# Altium PCB PCB1.PcbDoc (part 1 of 2)
Units mm, origin at the board's own origin, x right, y up, seen from the top; angles counter-clockwise.
Board outline 88.39 x 69.6 mm, 4 copper layers (Top Layer, Layer 2, Layer 3, Bottom Layer), stack 0.603 mm thick; 126 components, 120 nets, 462 pads, 224 vias.
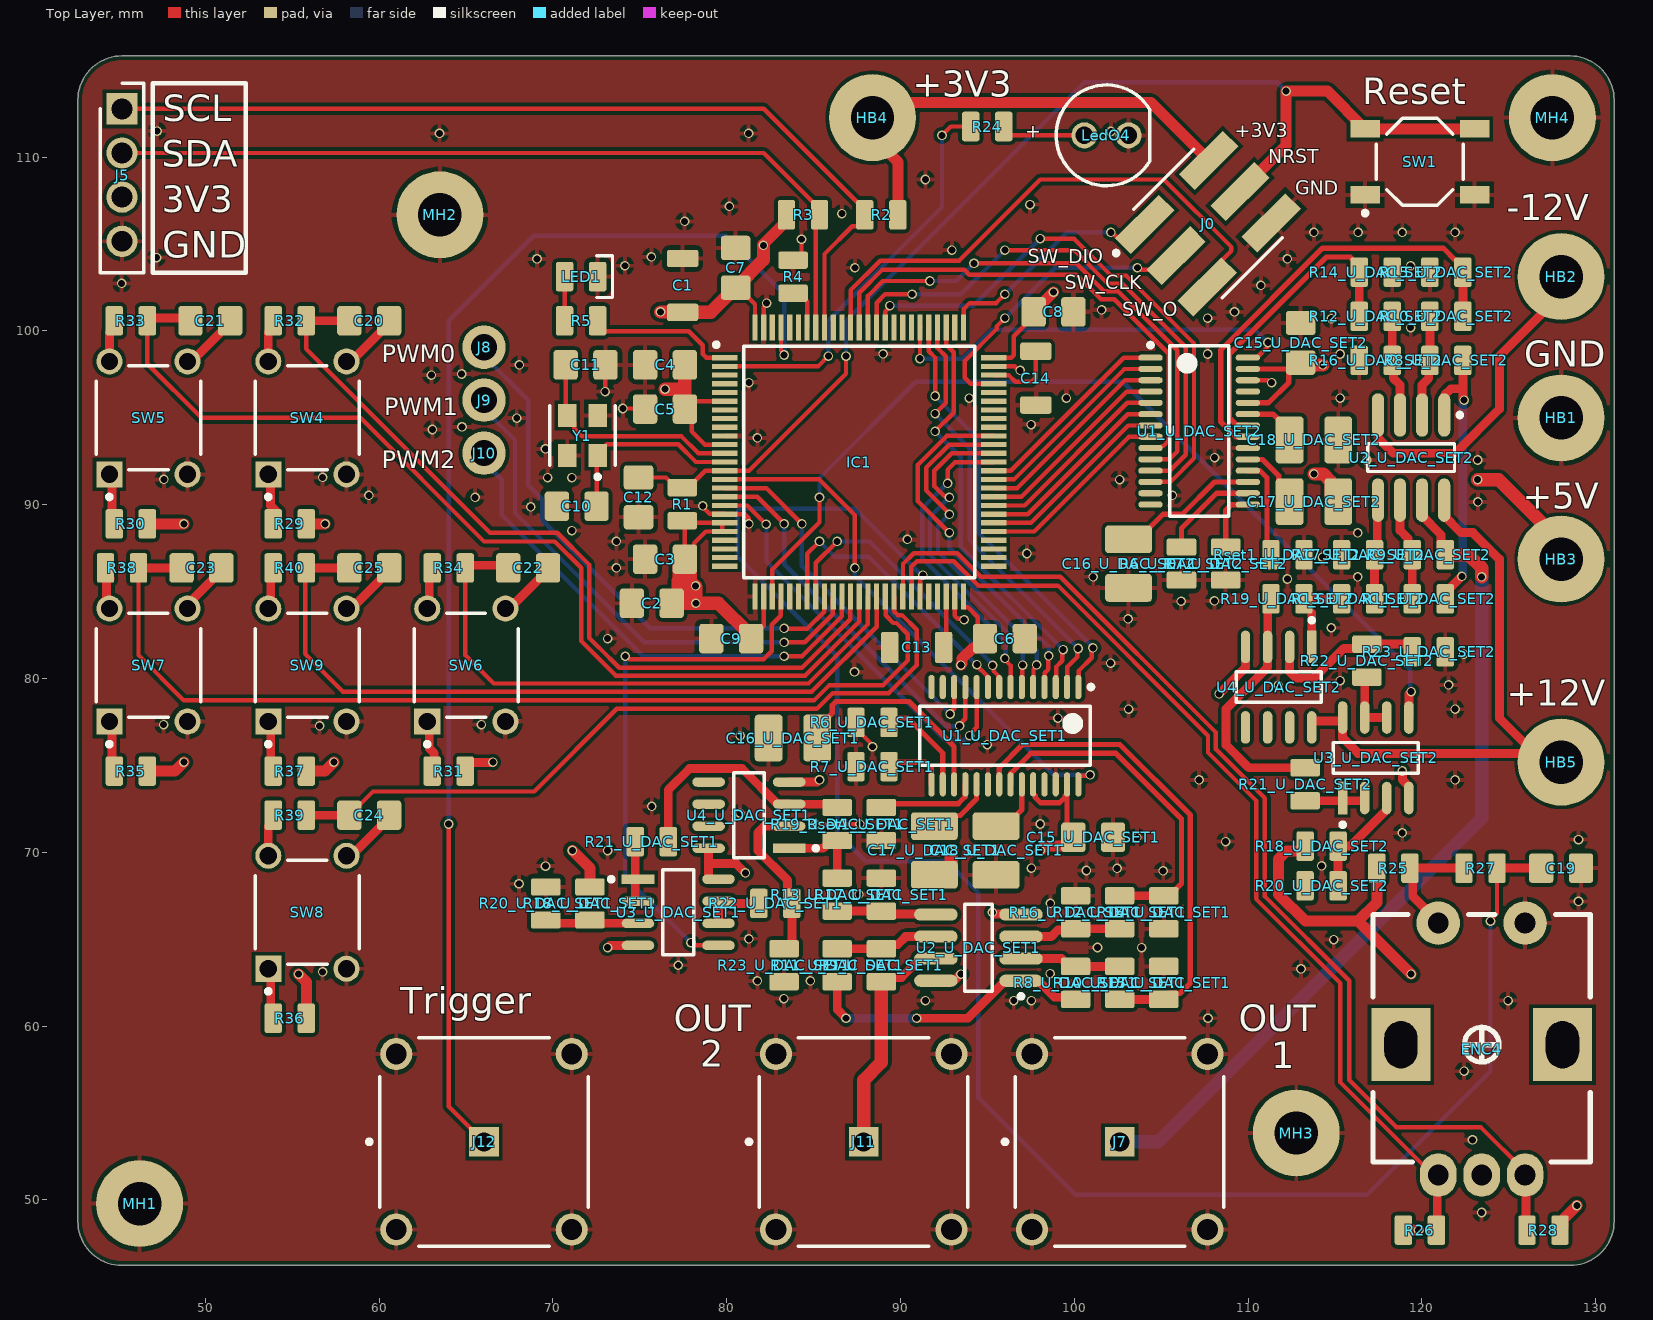
[diagram p0: Top Layer view]
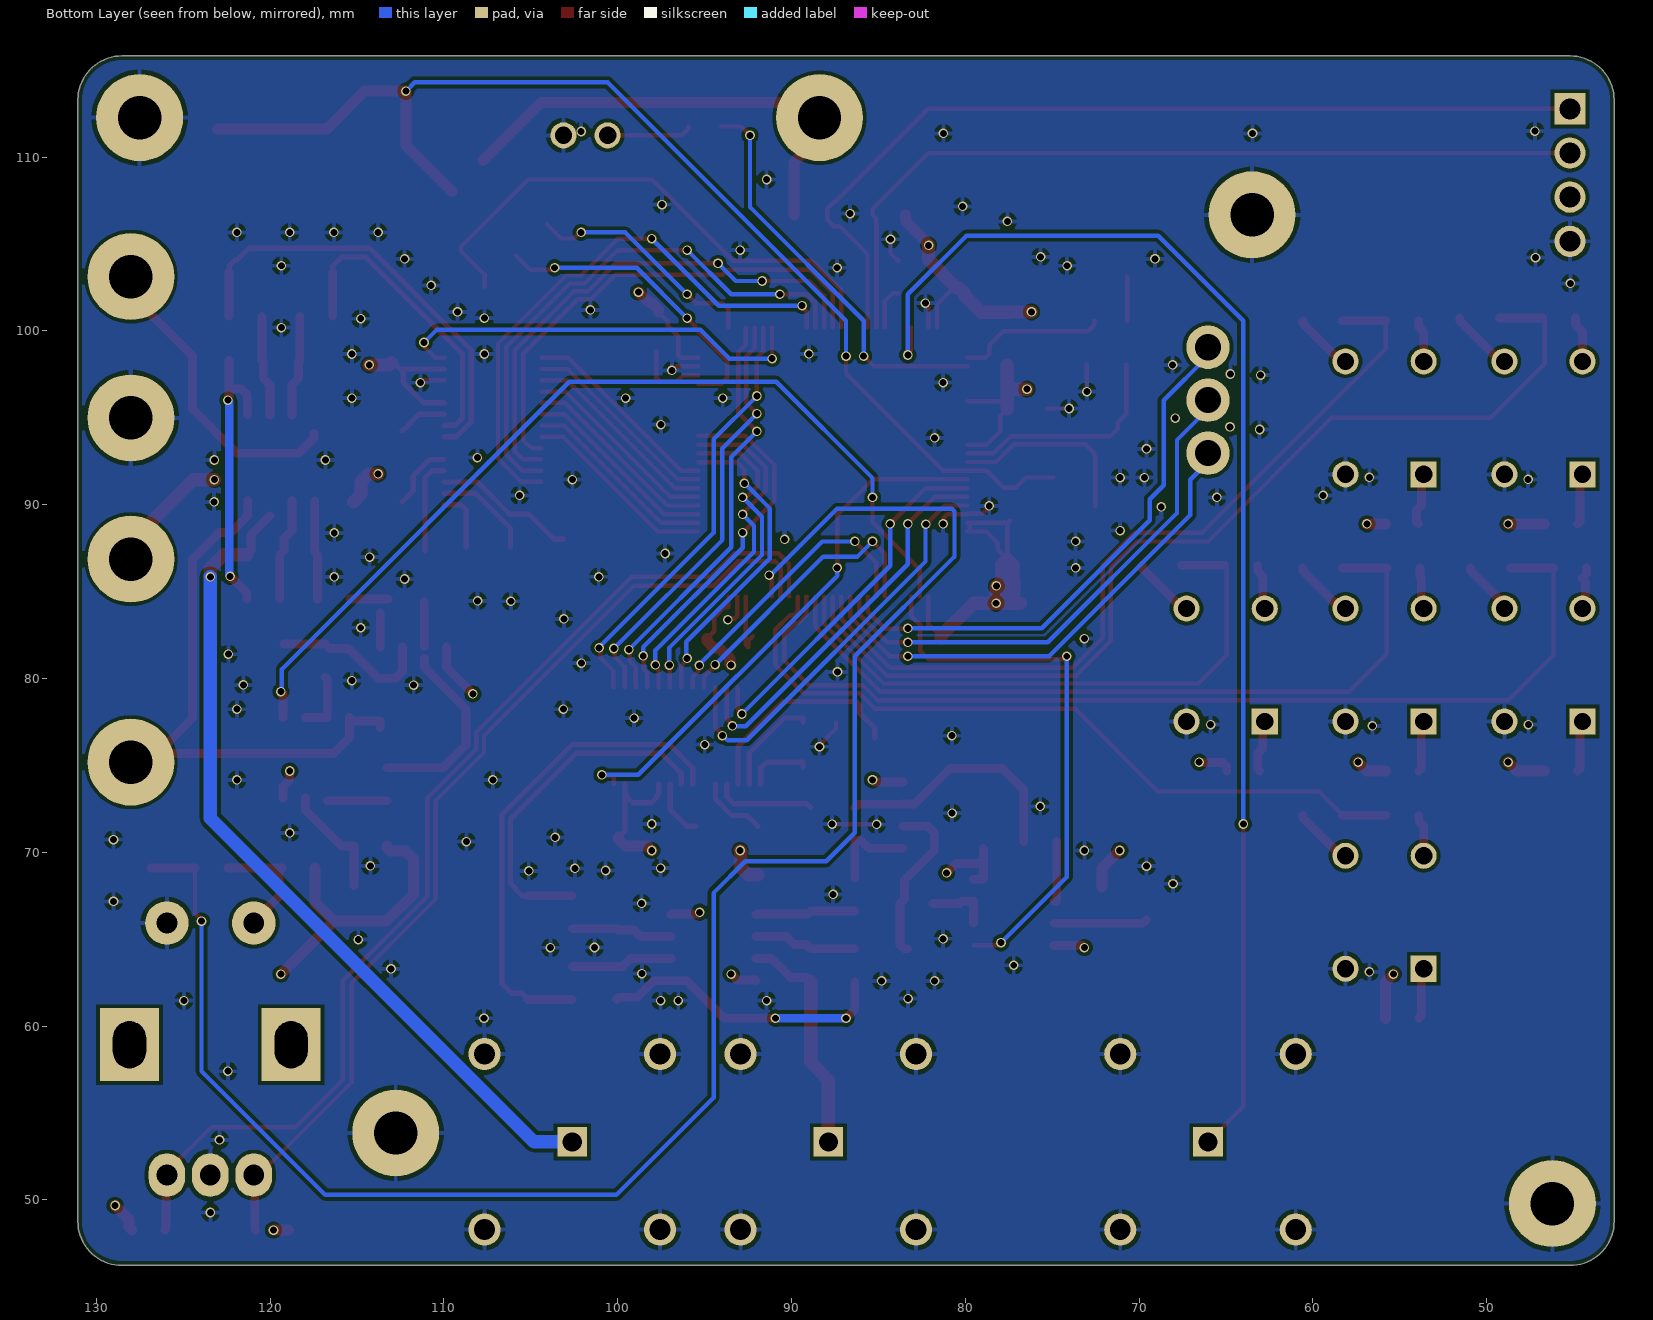
[diagram p1: Bottom Layer view, seen from below]
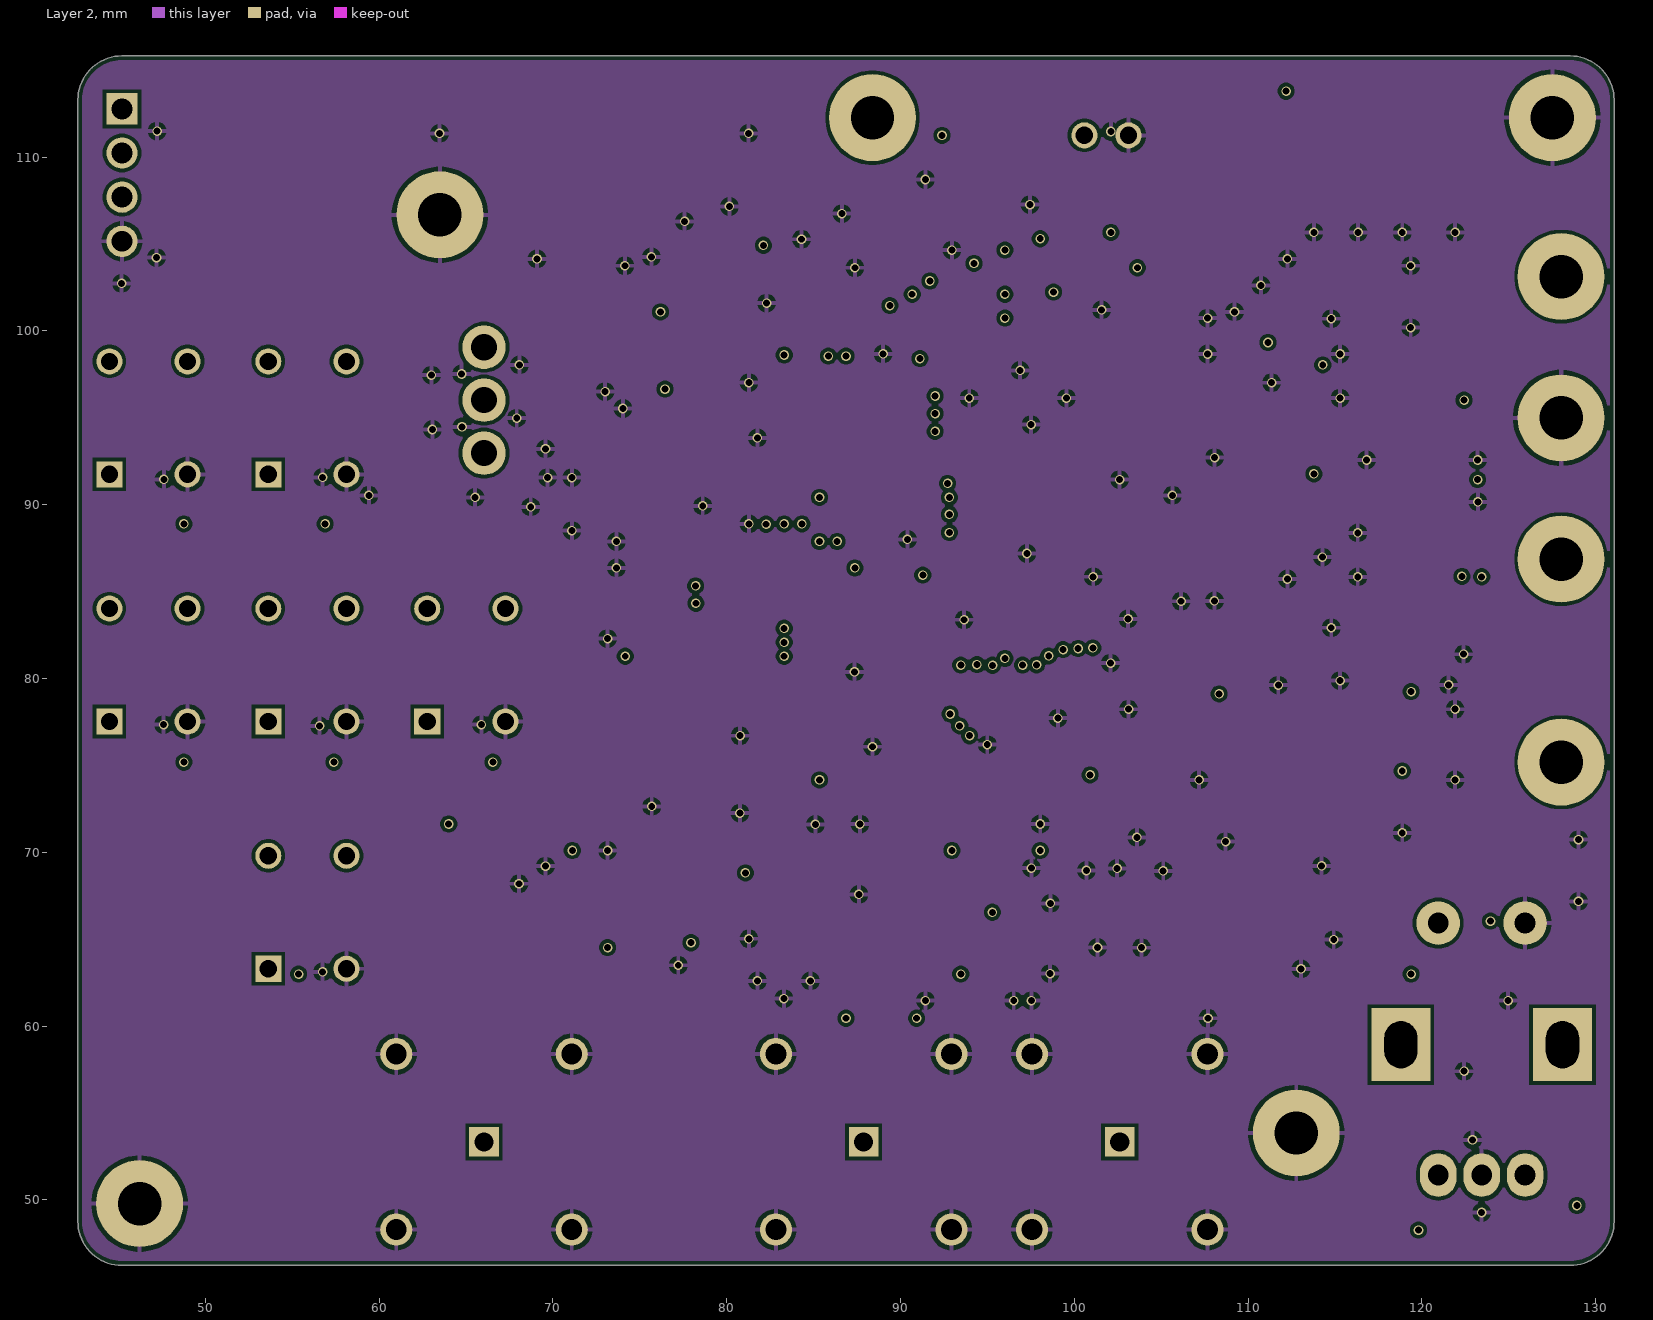
[diagram p2: Layer 2]
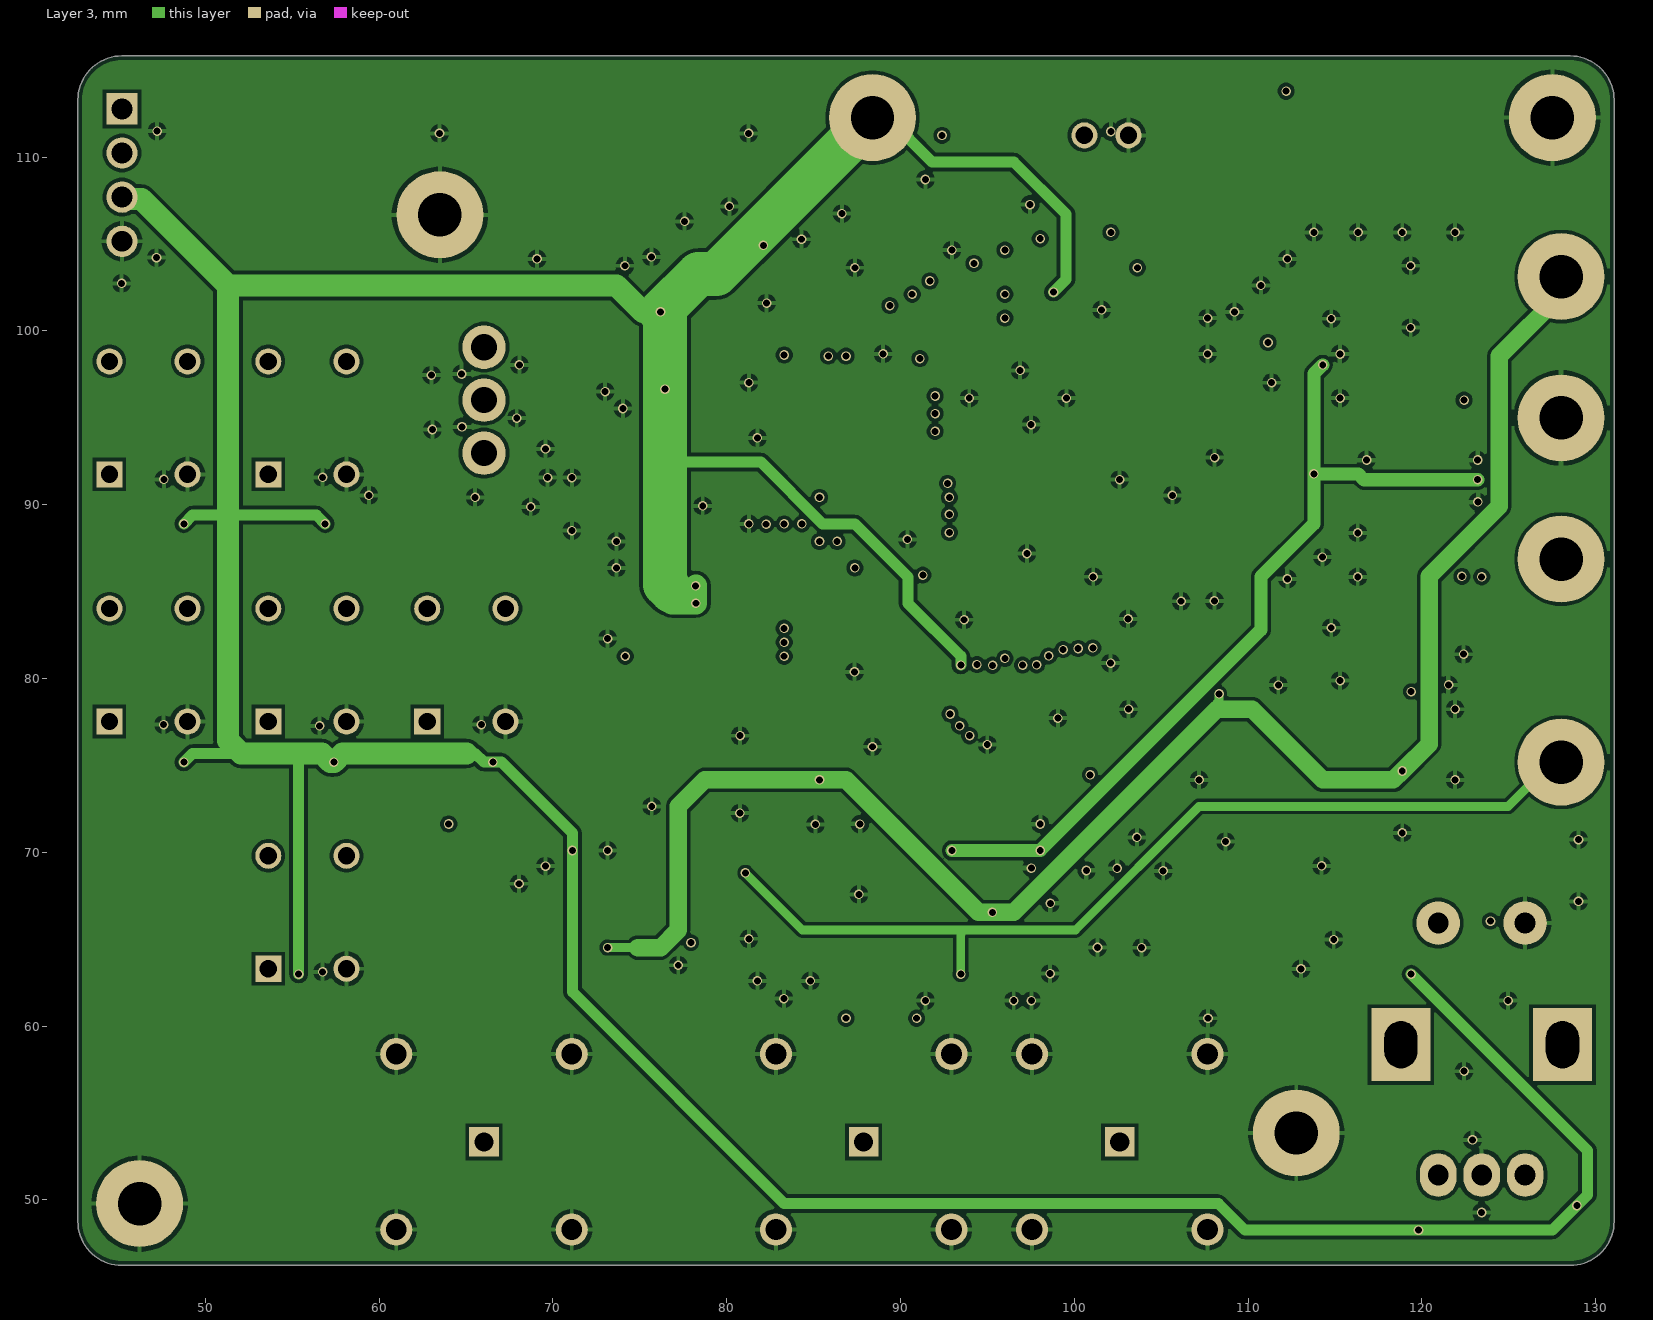
[diagram p3: Layer 3]
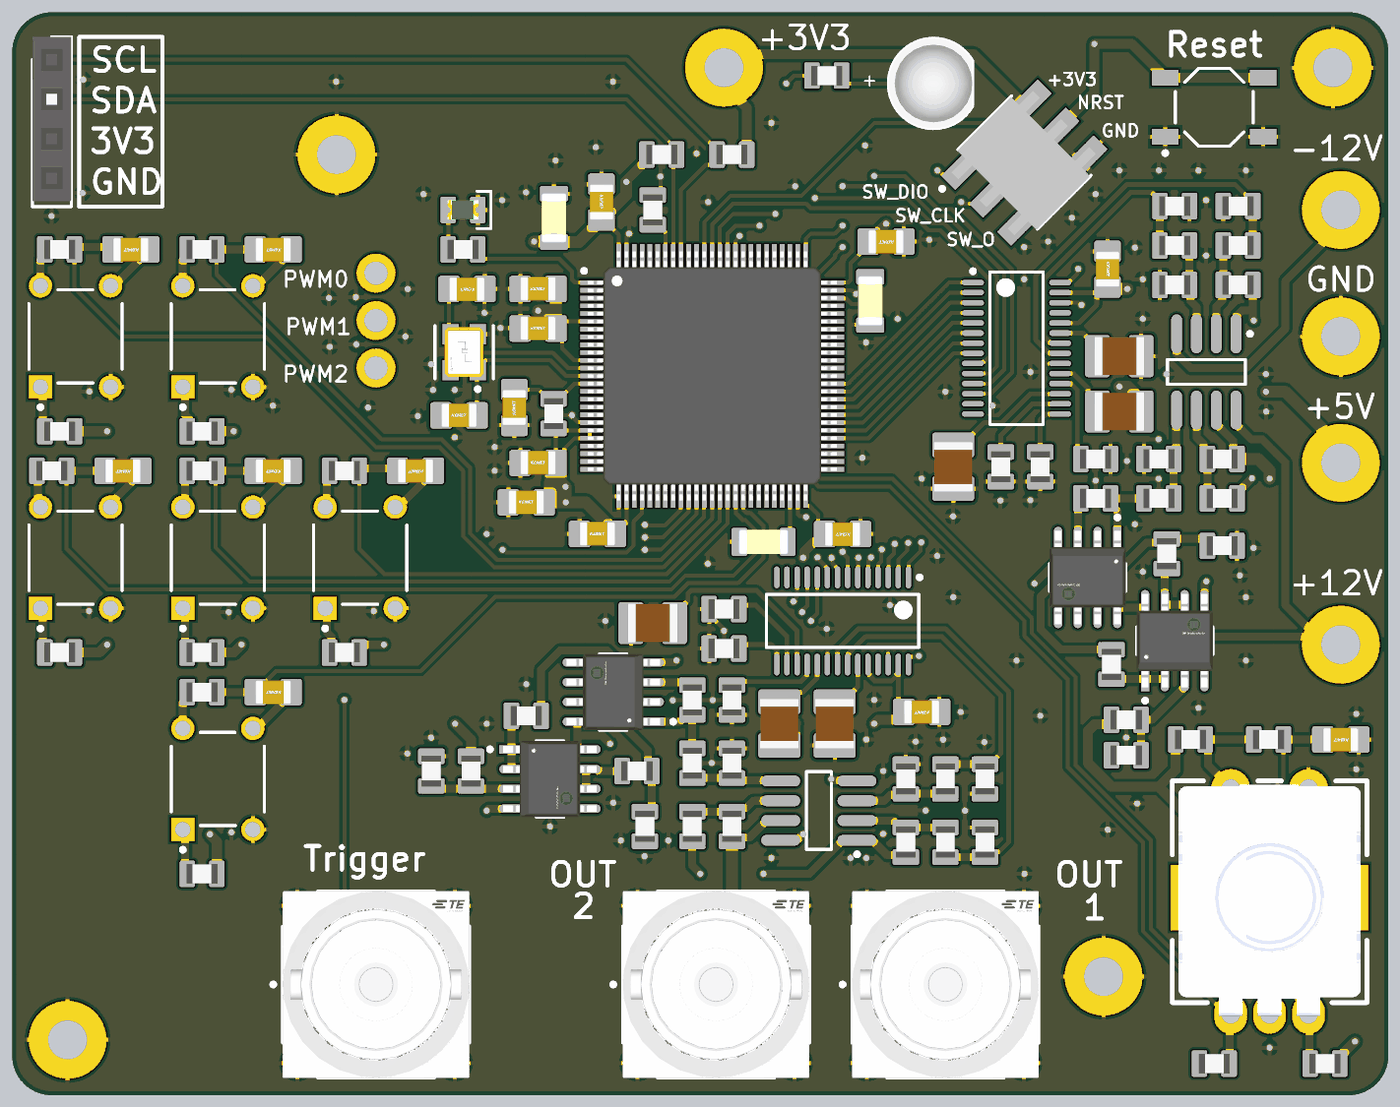
[diagram p5: 3D render of the assembled board from above, using the file's embedded part models]

## Layer stack, top to bottom
Top Solder: solder mask 0.0102, Solder Resist, Dk 3.5
Top Layer: signal copper 0.035
Dielectric 2: prepreg 0.0711, PP-006, Dk 4.1
Layer 2: signal copper 0.0356
Dielectric 1: dielectric 0.32, FR-4, Dk 4.8
Layer 3: signal copper 0.0356
Dielectric 3: prepreg 0.0711, PP-006, Dk 4.1
Bottom Layer: signal copper 0.035
Bottom Solder: solder mask 0.0102, Solder Resist, Dk 3.5

## Board outline
42.672,48.768 42.672,113.284 cw(c45.212,113.284) 45.212,115.824 128.524,115.824 cw(c128.524,113.284) 131.064,113.284 131.064,48.768 cw(c128.524,48.768) 128.524,46.228 45.212,46.228 cw(c45.212,48.768)

## Design rules (kind name [scope] priority, off if disabled: settings)
BoardOutlineClearance [All] p1: gap=0.254 ignorepadtopadclearanceinfootprint=FALSE except(0: Arc-SplitContinuation Track-SplitContinuation SMDPad-SplitContinuation THPad-SplitContinuation Via-SplitContinuation Fill-SplitContinuation Poly-SplitContinuation Region-SplitContinuation Text-SplitContinuation)
Clearance [All] p1: gap=0.203 ignorepadtopadclearanceinfootprint=TRUE
Creepage [All] p1 off: checkdistance=0.254 applytopolygonpour=TRUE
HoleSize [All] p1: absolutevalues=TRUE maxlimit=7.62 minlimit=0.025 maxpercent=80.000 minpercent=20.000
MinimumSolderMaskSliver [All] p1: minsoldermaskwidth=0.051
PolygonConnect [All] p1: connectstyle=Relief reliefconductorwidth=0.254 reliefentries=4 polygonreliefangle="90 Angle" airgapwidth=0.254
RoutingVias [All] p1: holewidth=0.711 width=1.27 viastyle="Through Hole" minholewidth=0.2 minwidth=0.3 maxholewidth=2.5 maxwidth=3
SilkToSolderMaskClearance [IsPad] p1: minsilkscreentomaskgap=0.102 clearancetoexposedcopper=TRUE
SolderMaskExpansion [All] p1: expansion=0.102 istentingtop=FALSE
SupplyNets "Schematic Supply Nets_4" [InNet('+3V3')] p1: voltage=0.000
SupplyNets "Schematic Supply Nets_3" [InNet('-12')] p2: voltage=0.000
SupplyNets "Schematic Supply Nets_2" [InNet('+12')] p3: voltage=0.000
SupplyNets "Schematic Supply Nets_1" [InNet('+5')] p4: voltage=0.000
SupplyNets "Schematic Supply Nets" [InNet('GND')] p5: voltage=0.000
Width [All] p1: maxlimit=3.81 minlimit=0.127 preferedwidth=1.27 midlayer1_prefwidth=0.762 midlayer2_prefwidth=0.762 minimp=50.000000 maximp=50.000000 favimp=50.000000
27 further rules are at their usual default settings.

## Classes and differential pairs
channel class DAC_SET1: U_DAC_SET1 U_DAC_SET2
component class U_Power_SET: HB1 HB2 HB3 HB4 HB5
component class U_Interface: C19 C20 C21 C22 C23 C24 C25 ENC4 J0 J5 J7 J8 J9 J10 J11 J12 LedO4 R24 R25 R26 R27 R28 R29 R30 R31 R32 R33 R34 R35 R36 R37 R38 R39 R40 SW4 SW5 SW6 SW7 SW8 SW9
component class U_DAC_SET2: C15_U_DAC_SET2 C16_U_DAC_SET2 C17_U_DAC_SET2 C18_U_DAC_SET2 R6_U_DAC_SET2 R7_U_DAC_SET2 R8_U_DAC_SET2 R9_U_DAC_SET2 R10_U_DAC_SET2 R11_U_DAC_SET2 R12_U_DAC_SET2 R13_U_DAC_SET2 R14_U_DAC_SET2 R15_U_DAC_SET2 R16_U_DAC_SET2 R17_U_DAC_SET2 R18_U_DAC_SET2 R19_U_DAC_SET2 R20_U_DAC_SET2 R21_U_DAC_SET2 R22_U_DAC_SET2 R23_U_DAC_SET2 Rset1_U_DAC_SET2 U1_U_DAC_SET2 U2_U_DAC_SET2 U3_U_DAC_SET2 U4_U_DAC_SET2
component class U_DAC_SET1: C15_U_DAC_SET1 C16_U_DAC_SET1 C17_U_DAC_SET1 C18_U_DAC_SET1 R6_U_DAC_SET1 R7_U_DAC_SET1 R8_U_DAC_SET1 R9_U_DAC_SET1 R10_U_DAC_SET1 R11_U_DAC_SET1 R12_U_DAC_SET1 R13_U_DAC_SET1 R14_U_DAC_SET1 R15_U_DAC_SET1 R16_U_DAC_SET1 R17_U_DAC_SET1 R18_U_DAC_SET1 R19_U_DAC_SET1 R20_U_DAC_SET1 R21_U_DAC_SET1 R22_U_DAC_SET1 R23_U_DAC_SET1 Rset1_U_DAC_SET1 U1_U_DAC_SET1 U2_U_DAC_SET1 U3_U_DAC_SET1 U4_U_DAC_SET1
component class Main_Schem: C1 C2 C3 C4 C5 C6 C7 C8 C9 C10 C11 C12 C13 C14 IC1 LED1 R1 R2 R3 R4 R5 SW1 Y1 ΜΗ1 ΜΗ2 ΜΗ3 ΜΗ4

## Components (designator, comment, footprint, x,y, rotation, side; value= is the part's Value field where it differs from the comment)
C1 "2u2" CAP_1206 77.47,102.616 r270 top
C2 "100n" CAP_0805 75.692,84.328 r0 top
C3 "100n" CAP_0805 76.454,86.868 r0 top
C4 "100n" CAP_0805 76.454,98.044 r0 top
C5 "100n" CAP_0805 76.454,95.504 r0 top
C6 "100n" CAP_0805 96.012,82.296 r180 top
C7 "100n" CAP_0805 80.518,103.632 r270 top
C8 "100n" CAP_0805 98.806,101.092 r180 top
C9 "100n" CAP_0805 80.264,82.296 r0 top
C10 "18p" CAP_0805 71.374,89.916 r0 top
C11 "18p" CAP_0805 71.882,98.044 r180 top
C12 "100n" CAP_0805 74.93,90.424 r90 top
C13 "2u2" CAP_1206 90.932,81.788 r0 top
C14 "2u2" CAP_1206 97.79,97.282 r90 top
C15_U_DAC_SET1 "100n" CAP_0805 101.092,70.866 r180 top (schematic designator C15)
C15_U_DAC_SET2 "100n" CAP_0805 113.03,99.314 r270 top (schematic designator C15)
C16_U_DAC_SET1 "0.1uF" CAP_1210 83.816,76.576 r180 top (schematic designator C16)
C16_U_DAC_SET2 "0.1uF" CAP_1210 103.124,86.614 r270 top (schematic designator C16)
C17_U_DAC_SET1 "0.1uF" CAP_1210 91.948,70.104 r270 top (schematic designator C17)
C17_U_DAC_SET2 "0.1uF" CAP_1210 113.792,90.17 r0 top (schematic designator C17)
C18_U_DAC_SET1 "0.1uF" CAP_1210 95.504,70.104 r270 top (schematic designator C18)
C18_U_DAC_SET2 "0.1uF" CAP_1210 113.792,93.726 r0 top (schematic designator C18)
C19 "CAP_0805" CAP_0805 128.016,69.088 r180 top
C20 "CAP_0805" CAP_0805 59.436,100.584 r180 top
C21 "CAP_0805" CAP_0805 50.292,100.584 r180 top
C22 "CAP_0805" CAP_0805 68.58,86.36 r180 top
C23 "CAP_0805" CAP_0805 49.784,86.36 r180 top
C24 "CAP_0805" CAP_0805 59.436,72.136 r180 top
C25 "CAP_0805" CAP_0805 59.436,86.36 r180 top
ENC4 "EN11-HSM1BF20" EN11-HSM 123.444,58.928 r0 top
HB1 "PTH-M2D5X5" PTH-M2D5X5 128.016,94.996 r90 top
HB2 "PTH-M2D5X5" PTH-M2D5X5 128.016,103.124 r90 top
HB3 "PTH-M2D5X5" PTH-M2D5X5 128.016,86.868 r180 top
HB4 "PTH-M2D5X5" PTH-M2D5X5 88.392,112.268 r90 top
HB5 "PTH-M2D5X5" PTH-M2D5X5 128.016,75.184 r90 top
IC1 "STM32H733VGT6" QFP50P1600X1600X160-100N 87.63,92.456 r0 top locked
J0 "5-146130-2" TECO-5-146130-2_V 107.696,106.172 r315 top
J5 "I2C Screen" RHDR4W70P0X254_1X4_1056X250X850P 45.212,112.776 r270 top
J7 "1-1337445-0" FP-1-1337445-0-MFG 102.616,53.34 r0 top
J8 "SOLDER_PIN_THT" SOLDER_PIN_THT_1_5 66.04,99.06 r270 top
J9 "SOLDER_PIN_THT" SOLDER_PIN_THT_1_5 66.04,96.012 r180 top
J10 "SOLDER_PIN_THT" SOLDER_PIN_THT_1_5 66.04,92.964 r180 top
J11 "1-1337445-0" FP-1-1337445-0-MFG 87.884,53.34 r0 top
J12 "1-1337445-0" FP-1-1337445-0-MFG 66.04,53.34 r0 top
LED1 "GREEN" LED_0805_GREEN 71.628,103.124 r180 top
LedO4 "151053GS03000" WL-TMRW_D5.8H11.7 101.854,111.252 r0 top
R1 "10k" RES_0805 77.447,90.031 r270 top
R2 "1k" RES_0805 88.9,106.68 r180 top
R3 "1k" RES_0805 84.394,106.68 r0 top
R4 "10k" RES_0805 83.82,103.124 r270 top
R5 "1k" RES_0805 71.628,100.584 r0 top
R6_U_DAC_SET1 "10k" RES_0805 88.392,77.47 r180 top (schematic designator R6)
R6_U_DAC_SET2 "10k" RES_0805 106.172,86.614 r270 top (schematic designator R6)
R7_U_DAC_SET1 "10k" RES_0805 88.392,74.93 r0 top (schematic designator R7)
R7_U_DAC_SET2 "10k" RES_0805 108.712,86.614 r90 top (schematic designator R7)
R8_U_DAC_SET1 "3900" RES_0805 100.076,62.484 r270 top (schematic designator R8)
R8_U_DAC_SET2 "3900" RES_0805 121.412,98.298 r0 top (schematic designator R8)
R9_U_DAC_SET1 "270" RES_0805 88.9,63.5 r90 top (schematic designator R9)
R9_U_DAC_SET2 "270" RES_0805 120.396,87.122 r180 top (schematic designator R9)
R10_U_DAC_SET1 "220" RES_0805 102.616,62.484 r270 top (schematic designator R10)
R10_U_DAC_SET2 "220" RES_0805 121.412,100.838 r0 top (schematic designator R10)
R11_U_DAC_SET1 "220" RES_0805 86.36,63.5 r270 top (schematic designator R11)
R11_U_DAC_SET2 "220" RES_0805 120.396,84.582 r0 top (schematic designator R11)
R12_U_DAC_SET1 "220" RES_0805 102.616,66.548 r90 top (schematic designator R12)
R12_U_DAC_SET2 "220" RES_0805 117.348,100.838 r180 top (schematic designator R12)
R13_U_DAC_SET1 "220" RES_0805 86.36,67.564 r90 top (schematic designator R13)
R13_U_DAC_SET2 "220" RES_0805 116.332,84.582 r180 top (schematic designator R13)
R14_U_DAC_SET1 "27" RES_0805 105.156,66.548 r270 top (schematic designator R14)
R14_U_DAC_SET2 "27" RES_0805 117.348,103.378 r0 top (schematic designator R14)
R15_U_DAC_SET1 "27" RES_0805 105.156,62.484 r90 top (schematic designator R15)
R15_U_DAC_SET2 "27" RES_0805 121.412,103.378 r180 top (schematic designator R15)
R16_U_DAC_SET1 "3900" RES_0805 100.076,66.548 r90 top (schematic designator R16)
R16_U_DAC_SET2 "3900" RES_0805 117.348,98.298 r180 top (schematic designator R16)
R17_U_DAC_SET1 "270" RES_0805 88.9,67.564 r90 top (schematic designator R17)
R17_U_DAC_SET2 "270" RES_0805 116.332,87.122 r180 top (schematic designator R17)
R18_U_DAC_SET1 "1000" RES_0805 72.136,67.056 r270 top (schematic designator R18)
R18_U_DAC_SET2 "1000" RES_0805 114.234,70.358 r0 top (schematic designator R18)
R19_U_DAC_SET1 "1000" RES_0805 86.36,71.628 r90 top (schematic designator R19)
R19_U_DAC_SET2 "1000" RES_0805 112.268,84.582 r180 top (schematic designator R19)
R20_U_DAC_SET1 "1000" RES_0805 69.596,67.056 r90 top (schematic designator R20)
R20_U_DAC_SET2 "1000" RES_0805 114.234,68.072 r180 top (schematic designator R20)
R21_U_DAC_SET1 "220" RES_0805 75.692,70.612 r180 top (schematic designator R21)
R21_U_DAC_SET2 "220" RES_0805 113.284,73.914 r270 top (schematic designator R21)
R22_U_DAC_SET1 "220" RES_0805 82.804,67.056 r180 top (schematic designator R22)
R22_U_DAC_SET2 "220" RES_0805 116.84,81.026 r270 top (schematic designator R22)
R23_U_DAC_SET1 "1000" RES_0805 83.312,63.5 r270 top (schematic designator R23)
R23_U_DAC_SET2 "1000" RES_0805 120.396,81.534 r0 top (schematic designator R23)
R24 "1k" RES_0805 94.996,111.76 r180 top
R25 "4k7" RES_0805 118.364,69.088 r180 top
R26 "4k7" RES_0805 119.888,48.26 r180 top
R27 "4k7" RES_0805 123.378,69.088 r180 top
R28 "4k7" RES_0805 127,48.26 r0 top
R29 "4k7" RES_0805 54.864,88.9 r0 top
R30 "4k7" RES_0805 45.72,88.9 r0 top
R31 "4k7" RES_0805 64.008,74.676 r0 top
R32 "4k7" RES_0805 54.864,100.584 r180 top
R33 "4k7" RES_0805 45.72,100.584 r180 top
R34 "4k7" RES_0805 64.008,86.36 r180 top
R35 "4k7" RES_0805 45.72,74.676 r0 top
R36 "4k7" RES_0805 54.864,60.452 r0 top
R37 "4k7" RES_0805 54.864,74.676 r0 top
R38 "4k7" RES_0805 45.212,86.36 r180 top
R39 "4k7" RES_0805 54.864,72.136 r180 top
R40 "4k7" RES_0805 54.864,86.36 r180 top
Rset1_U_DAC_SET1 "4k" RES_0805 88.9,71.628 r90 top (schematic designator Rset1)
Rset1_U_DAC_SET2 "4k" RES_0805 112.268,87.122 r180 top (schematic designator Rset1)
SW1 "TL3342F160QG" ESWI-TL3342F160QG_V 119.888,109.728 r90 top
SW4 "1825910-6" TECO-1825910-6_V 55.88,94.996 r90 top locked
SW5 "1825910-6" TECO-1825910-6_V 46.736,94.996 r90 top
SW6 "1825910-6" TECO-1825910-6_V 65.024,80.772 r90 top
SW7 "1825910-6" TECO-1825910-6_V 46.736,80.772 r90 top
SW8 "1825910-6" TECO-1825910-6_V 55.88,66.548 r90 top
SW9 "1825910-6" TECO-1825910-6_V 55.88,80.772 r90 top
U1_U_DAC_SET1 "DAC902E" TI-PW28_L 96.012,76.708 r270 top (schematic designator U1)
U1_U_DAC_SET2 "DAC902E" TI-PW28_L 107.188,94.234 r0 top (schematic designator U1)
U2_U_DAC_SET1 "AD8066ARZ-R7" ADI-R-8_M 94.488,64.516 r180 top (schematic designator U2)
U2_U_DAC_SET2 "AD8066ARZ-R7" ADI-R-8_M 119.38,92.71 r270 top (schematic designator U2)
U3_U_DAC_SET1 "LM358DR2G" FP-751-07-IPC_C 77.216,66.548 r0 top (schematic designator U3)
U3_U_DAC_SET2 "LM358DR2G" FP-751-07-IPC_C 117.348,75.438 r90 top (schematic designator U3)
U4_U_DAC_SET1 "LM358DR2G" FP-751-07-IPC_C 81.28,72.136 r180 top (schematic designator U4)
U4_U_DAC_SET2 "LM358DR2G" FP-751-07-IPC_C 111.76,79.502 r270 top (schematic designator U4)
Y1 "48MHz" FP-ABM8-MFG 71.703,93.98 r90 top
ΜΗ1 "PTH-M2D5X5" PTH-M2D5X5 46.228,49.784 r0 top
ΜΗ2 "PTH-M2D5X5" PTH-M2D5X5 63.5,106.68 r0 top
ΜΗ3 "PTH-M2D5X5" PTH-M2D5X5 112.776,53.848 r0 top
ΜΗ4 "PTH-M2D5X5" PTH-M2D5X5 127.508,112.268 r0 top

## Footprints (in the part's own frame and the unit in brackets; to place one, negate y for a bottom-side part, rotate by r counter-clockwise, add the part's x,y. Pads: shape width x height; smd on the part's side, far side on the other; paste and mask are expansions set on the pad)
ADI-R-8_M [mm] "SOIC, 8-Leads, Body 4.9x3.9mm, Pitch 1.27mm, IPC Low Density"
  oval 2.5x0.7 smd: 1(-2.45,1.905) 2(-2.45,0.635) 3(-2.45,-0.635) 4(-2.45,-1.905) 5(2.45,-1.905) 6(2.45,-0.635) 7(2.45,0.635) 8(2.45,1.905)
  silkscreen extent -2.58,-2.5 0.8,2.93, body extent -2,-2.5 2,2.5, height 1.75
CAP_0805 [mm]
  rrect25% 1.4x1.7 smd: 1(-1.143,0) 2(1.143,0)
  body extent -1.15,-0.76 1.15,0.79, height 1.01
CAP_1206 [mm]
  rrect25% 1x1.8 smd: 1(-1.55,0) 2(1.55,0)
  body extent -1.6,-0.8 1.6,0.8, height 0.94
CAP_1210 [mm]
  rrect25% 1.6x2.7 smd: 1(-1.4,0) 2(1.4,0)
  body extent -1.6,-1.25 1.6,1.25, height 2.5
EN11-HSM [mm]
  oval 2.1x2.5 hole 1.2: A(-2.5,-7.5) B(2.5,-7.5) C(0,-7.5)
  round 2.5 hole 1.2: D(-2.5,7) E(2.5,7)
  rect 3.4x4.2 hole 1.9 slot 2.7 at 90 deg: MH(-4.65,0) MH(4.65,0)
  silkscreen extent -6.25,-6.75 6.25,7.5, body extent -5.85,-7.63 5.85,7.25, height 21.65
ESWI-TL3342F160QG_V [mm] "SMD, 4-Leads, Body 5x5mm, Pitch 6.3mm"
  rect 1x1.7 smd: 1(-1.9,3.15) 2(-1.9,-3.15) 3(1.9,3.15) 4(1.9,-3.15)
  silkscreen extent -3.07,-2.5 2.5,3.27, body extent -2.5,-2.5 2.5,2.5, height 1.5
FP-1-1337445-0-MFG [mm]
  rect 1.7x1.7 hole 1.1 paste-2539.97: 1(0,0)
  round 1.85 hole 1.2 paste-2539.97: 2(-5.05,5.05) 3(5.05,5.05) 4(-5.05,-5.05) 5(5.05,-5.05)
  silkscreen extent -6.72,-6 6,6, body extent -6.1,-6.1 6.1,6.1, height 0.25
FP-751-07-IPC_C [mm]
  rect 1.874x0.543 smd paste+0: 1(-2.316,1.905)
  rrect100% 1.874x0.543 smd paste+0: 2(-2.316,0.635) 3(-2.316,-0.635) 4(-2.316,-1.905) 5(2.316,-1.905) 6(2.316,-0.635) 7(2.316,0.635) 8(2.316,1.905)
  silkscreen extent -3.98,-2.45 0.88,2.45, body extent -3.35,-2.55 3.35,2.55, height 0.25
FP-ABM8-MFG [mm]
  rect 1.3x1.05 smd paste+0: 1(-1.15,-0.875) 2(1.15,-0.875) 3(1.15,0.875) 4(-1.15,0.875)
  silkscreen extent -2.5,-1.88 1.7,1.88, body extent -1.9,-1.5 1.9,1.5, height 0.25
LED_0805_GREEN [mm]
  rrect25% 1x1.7 smd: A(0.95,0) K(-0.95,0)
  silkscreen extent -1.8,-1.2 -0.9,1.2, body extent -1,-0.63 1,0.63, height 1.12
PTH-M2D5X5 [mm]
  round 5 hole 2.5: 1(0,0)
QFP50P1600X1600X160-100N [mm]
  rect 1.475x0.3 smd: 1(-7.738,6) 2(-7.738,5.5) 3(-7.738,5) 4(-7.738,4.5) 5(-7.738,4) 6(-7.738,3.5) 7(-7.738,3) 8(-7.738,2.5) 9(-7.738,2) 10(-7.738,1.5) 11(-7.738,1) 12(-7.738,0.5) 13(-7.738,0) 14(-7.738,-0.5) 15(-7.738,-1) 16(-7.738,-1.5) 17(-7.738,-2) 18(-7.738,-2.5) 19(-7.738,-3) 20(-7.738,-3.5) 21(-7.738,-4) 22(-7.738,-4.5) 23(-7.738,-5) 24(-7.738,-5.5) 25(-7.738,-6) 51(7.738,-6) 52(7.738,-5.5) 53(7.738,-5) 54(7.738,-4.5) 55(7.738,-4) 56(7.738,-3.5) 57(7.738,-3) 58(7.738,-2.5) 59(7.738,-2) 60(7.738,-1.5) 61(7.738,-1) 62(7.738,-0.5) 63(7.738,0) 64(7.738,0.5) 65(7.738,1) 66(7.738,1.5) 67(7.738,2) 68(7.738,2.5) 69(7.738,3) 70(7.738,3.5) 71(7.738,4) 72(7.738,4.5) 73(7.738,5) 74(7.738,5.5) 75(7.738,6)
  rect 0.3x1.475 smd: 26(-6,-7.738) 27(-5.5,-7.738) 28(-5,-7.738) 29(-4.5,-7.738) 30(-4,-7.738) 31(-3.5,-7.738) 32(-3,-7.738) 33(-2.5,-7.738) 34(-2,-7.738) 35(-1.5,-7.738) 36(-1,-7.738) 37(-0.5,-7.738) 38(0,-7.738) 39(0.5,-7.738) 40(1,-7.738) 41(1.5,-7.738) 42(2,-7.738) 43(2.5,-7.738) 44(3,-7.738) 45(3.5,-7.738) 46(4,-7.738) 47(4.5,-7.738) 48(5,-7.738) 49(5.5,-7.738) 50(6,-7.738) 76(6,7.738) 77(5.5,7.738) 78(5,7.738) 79(4.5,7.738) 80(4,7.738) 81(3.5,7.738) 82(3,7.738) 83(2.5,7.738) 84(2,7.738) 85(1.5,7.738) 86(1,7.738) 87(0.5,7.738) 88(0,7.738) 89(-0.5,7.738) 90(-1,7.738) 91(-1.5,7.738) 92(-2,7.738) 93(-2.5,7.738) 94(-3,7.738) 95(-3.5,7.738) 96(-4,7.738) 97(-4.5,7.738) 98(-5,7.738) 99(-5.5,7.738) 100(-6,7.738)
  silkscreen extent -8.35,-6.65 6.65,6.87, body extent -8,-8 8,8, height 1.61
RES_0805 [mm]
  rrect25% 1x1.7 smd: 1(-0.95,0) 2(0.95,0)
  body extent -1,-0.63 1,0.63, height 0.47
RHDR4W70P0X254_1X4_1056X250X850P [mm]
  rect 1.8x1.8 hole 1.2: 1(0,0)
  round 1.8 hole 1.2: 2(2.54,0) 3(5.08,0) 4(7.62,0)
  silkscreen extent -1.47,-1.25 9.44,1.25, body extent -1.47,-1.25 9.09,1.25, height 8.5
SOLDER_PIN_THT_1_5 [mm]
  round 2.5 hole 1.5: 1(0,0)
TECO-5-146130-2_V [mm] "Header, 6-Leads, Body 7.21x4.88mm, Pitch 2.54mm"
  rect 1.27x3.56 smd: 1(-2.54,-2.605) 2(-2.54,2.605) 3(0,-2.605) 4(0,2.605) 5(2.54,-2.605) 6(2.54,2.605)
  silkscreen extent -3.6,-5.06 3.6,2.44, body extent -3.61,-3.77 3.61,3.64, height 9.74
TECO-1825910-6_V [mm] "Switch, 4-Leads, Body 5.99x5.99mm"
  rect 1.5x1.5 hole 0.99: 1(-3.25,2.25)
  round 1.5 hole 0.99: 2(3.25,2.25) 3(-3.25,-2.25) 4(3.25,-2.25)
  silkscreen extent -4.67,-2.99 2.99,3, body extent -3,-2.99 2.99,3, height 5
TI-PW28_L [mm] "SOP, 28-Leads, Body 9.7x4.4mm, Pitch 0.65mm, IPC High Density"
  oval 1.4x0.35 smd: 1(-2.8,4.225) 2(-2.8,3.575) 3(-2.8,2.925) 4(-2.8,2.275) 5(-2.8,1.625) 6(-2.8,0.975) 7(-2.8,0.325) 8(-2.8,-0.325) 9(-2.8,-0.975) 10(-2.8,-1.625) 11(-2.8,-2.275) 12(-2.8,-2.925) 13(-2.8,-3.575) 14(-2.8,-4.225) 15(2.8,-4.225) 16(2.8,-3.575) 17(2.8,-2.925) 18(2.8,-2.275) 19(2.8,-1.625) 20(2.8,-0.975) 21(2.8,-0.325) 22(2.8,0.325) 23(2.8,0.975) 24(2.8,1.625) 25(2.8,2.275) 26(2.8,2.925) 27(2.8,3.575) 28(2.8,4.225)
  silkscreen extent -2.92,-4.9 1.7,5.08, body extent -2.25,-4.9 2.25,4.9, height 1.2
WL-TMRW_D5.8H11.7 [mm] "THT Mono-color Round LED, 2-leads"
  round 1.5 hole 1: 1(1.27,0) 2(-1.27,0)
  silkscreen extent -2.9,-2.9 2.5,2.9, body extent -2.9,-2.9 2.5,2.9, height 11.7

## Part data
C1 C13 C14: library part CAP_1206, "Capacitor SMD 1206"
C2 C3 C4 C5 C6 C7 C8 C9 C10 C11 C12 C15_U_DAC_SET1 C15_U_DAC_SET2: library part CAP_0805, "Capacitor SMD 0805"
C16_U_DAC_SET1 C16_U_DAC_SET2 C17_U_DAC_SET1 C17_U_DAC_SET2 C18_U_DAC_SET1 C18_U_DAC_SET2: library part CAP_1210, "Capacitor SMD 1210"
C19 C20 C21 C22 C23 C24 C25: library part CMP-001-00086-1, "Capacitor SMD 0805", Component Type=Standard, Design Item ID=CAP_0805, Pins=2, Source=Kostas_Psarras_Schem_Lib.SchLib
ENC4: "Rotary Encoder with Switch 20 Detents 7mm Bushing 20mm Threaded Shaft Vertical", Manufacturer="TT Electronics", Distributor Link=https://www.mouser.de/ProductDetail/BI-Technologies-TT-Electronics/EN11-HSM1BF20?qs=%252BUYXD5bnyXp4Uf1MU7v3zw%3D%3D, Manufacturer Part Number=EN11-HSM1BF20
HB1 HB2 HB3 HB4 HB5 ΜΗ1 ΜΗ2 ΜΗ3 ΜΗ4: library part CMP-00028-00004-2, "M2 PTH (2.5mm), 5mm pad", Pins=1
IC1: library part CMP-020-00025-4, "(550MHz), DAC"
J0: library part CMP-002-00018-2, "Male Header, Pitch 2.54 mm, 2 x 3 Position, Height 8.13 mm, -65 to 125 degC, RoHS, Tube", Manufacturer="TE Connectivity", Max Operating Temperature=125°C, Min Operating Temperature=-65°C, Package Description="Male Header, Pitch 2.54 mm, 2 x 3 Position, Height 8.13 mm", Case/Package=5-146130-2, Connector Type=Header, Datasheet URL=http://www.te.com/commerce/DocumentDelivery/DDEController?Action=showdoc&DocId=Customer+Drawing%7F146130%7FM%7Fpdf%7FEnglish%7FENG_CD_146130_M.pdf%7F5-146130-2, Datasheet Version=Oct-15, Gender=Male, Manufacturer URL=http://www.te.com/, Mounting Technology=SM, Package Reference=5-146130-2, RoHS Compliant=Unknown
J5: library part CMP-002-00191-1, "M20: 4 Pos Receptacle SIL Straight 3mm THT Connector 8.5mm high Tin", Manufacturer_Name=Harwin, Manufacturer_Part_Number=M20-7820446, Mouser Part Number=855-M20-7820446, Datasheet Link=https://content.harwin.com/m/c2ac50ebb1c800d5/original/DRG-00385-Technical-Drawing-Datasheet-M20-782-pdf.pdf, Design Item ID=M20-7820446, Height=8.5mm, Mouser Price/Stock=https://www.mouser.co.uk/ProductDetail/Harwin/M20-7820446?qs=vF78I%252BjhbY8%252Bno0H8mp9XA%3D%3D, Source=Kostas_Psarras_Schem_Lib.SchLib
J7 J11 J12: library part CMP-03357-000006-1, "CONN BNC JACK STR 50 OHM PCB", Dielectric Material=PTFE, Frequency=4GHz, Insulation Resistance=5GR, Max Operating Temperature=165°C, Min Operating Temperature=-65°C, Operating Frequency="0 to 4Hz", Package Quantity=50, Body Material=Brass, Body Plating=Silver, Connector Type=BNC, Contact Material=Brass, Contact Plating=Silver, Depth=12mm, ELV=Compliant, Fastening Type=Bayonet, Gender=Female, Impedance=50R, Insulation Material=Polytetrafluoroethylene, Length=12mm, Material=Brass, Max Frequency=4GHz, Mount="Through Hole", Number of Positions=1, Orientation=Straight, Packaging=Bag, PCB Mount Retention=With, PCB Mounting Orientation=Vertical, PCB Thickness=0.126inch, Radiation Hardening=No, RoHS Compliant=Yes, Sealable="No (Without)", Series=BNC, Termination=Solder
J8 J9 J10: library part CMP-018-000020-1, "Solder Pin 1.5mm Through-Hole", Design Item ID=SOLDER_PIN_THT, Source=Kostas_Psarras_Schem_Lib.SchLib
LED1: library part LED_0805_GREEN, "LED 0805 GREEN SMD"
LedO4: library part CMP-1489-00005-2, Case/Package=Radial, Color=Green, Forward Current=100mA, Forward Voltage=3.4V, Max Operating Temperature=85°C, Max Reverse Voltage (DC)=5V, Min Operating Temperature=-40°C, Test Current=20mA, Dominant Wavelength=522nm, Height=8.6mm, Length=5mm, Lens Size=5mm, Lens Style="Circular, Clear, Round", Luminous Intensity=10cd, Mount="Through Hole", NexarPartId=29717817, Packaging=Bulk, Peak Wavelength=515nm, REACH SVHC=Unknown, RoHS=Compliant, Viewing Angle=30°, Wavelength=522nm, Width=5mm
R1 R2 R3 R4 R5 R6_U_DAC_SET1 R6_U_DAC_SET2 R7_U_DAC_SET1 R7_U_DAC_SET2 R8_U_DAC_SET1 R8_U_DAC_SET2 R9_U_DAC_SET1 R9_U_DAC_SET2 R10_U_DAC_SET1 R10_U_DAC_SET2 R11_U_DAC_SET1 R11_U_DAC_SET2 R12_U_DAC_SET1 R12_U_DAC_SET2 R13_U_DAC_SET1 R13_U_DAC_SET2 R14_U_DAC_SET1 R14_U_DAC_SET2 R15_U_DAC_SET1 R15_U_DAC_SET2 R16_U_DAC_SET1 R16_U_DAC_SET2 R17_U_DAC_SET1 R17_U_DAC_SET2 R18_U_DAC_SET1 R18_U_DAC_SET2 R19_U_DAC_SET1 R19_U_DAC_SET2 R20_U_DAC_SET1 R20_U_DAC_SET2 R21_U_DAC_SET1 R21_U_DAC_SET2 R22_U_DAC_SET1 R22_U_DAC_SET2 R23_U_DAC_SET1 R23_U_DAC_SET2 R24 Rset1_U_DAC_SET1 Rset1_U_DAC_SET2: library part RES_0805, "Resistor SMD 0805"
R25 R26 R27 R28 R29 R30 R31 R32 R33 R34 R35 R36 R37 R38 R39 R40: library part CMP-009-00182-1, "Resistor SMD 0805", Component Type=Standard, Design Item ID=RES_0805, Pins=2, Source=Kostas_Psarras_Schem_Lib.SchLib
SW1: library part CMP-011-00008-2, "Tactile Switch, SPST-NO, 50 mA, 12 V, 4-Pin SMD, RoHS, Tape and Reel", Current Rating=50mA, Manufacturer=E-Switch, Max Voltage Rating (DC)=12V, Operating Force=1.6N, Package Description="4-Pin Surface Mount Device, Body 5 x 5 mm, Pitch 6.3 mm", Package Quantity=3000, Case/Package=TL3342F160QG, Contact Material=Silver, Contact Plating=Silver, Datasheet URL=http://spec_sheets.e-switch.com/specs/P010632.pdf, Datasheet Version="Rev. I, 12/2010", Manufacturer URL=http://www.e-switch.ch/en/, Mounting Technology=SM, Package Reference=TL3342F160QG, Packaging=TapeandReel, RoHS Compliant=True, Throw Configuration=SPST, Voltage Rating (DC)=12V
SW4 SW5 SW6 SW7 SW8 SW9: library part CMP-1684-00021-1, "Tact Switch, SPST-NO, 0.05 A, -35 to 85 degC, 4-Pin THD, RoHS, Bulk", Actuator Color=Black, Contact Rating @ Voltage=0.05A@24VDC, Dielectric Strength=500VAC, Manufacturer="TE Connectivity", Maximum AC Voltage Rating=N/A, Maximum Contact Resistance=100mOhm, Maximum DC Voltage Rating=24V, Minimum Insulation Resistance=100MOhm, Operating Temperature=-35to85C, Package Description="4-Pin Through Hole Device, Body 5.99 x 5.99 mm, Pitch 6.5 mm", Package Reference=THD, Actuator Length=1.4mm, Actuator Material=PolybutyleneTerephthalate, Actuator Style=RoundButton, Base Material=N/A, Body Orientation=Straight, Bushing Type=Unthreaded, Contact Material=CopperAlloy, Contact Plating=Silver, Datasheet URL=http://www.te.com/commerce/DocumentDelivery/DDEController?Action=showdoc&DocId=Customer+Drawing%7F1825910%7FC9%7Fpdf%7FEnglish%7FENG_CD_1825910_C9.pdf%7F1825910-6, Datasheet Version="Rev. C9", Dimension=5.99x5mm, Electrical Life=100000Cycles, Family=1825910, Function=MomentaryContact, Housing Material=N/A, Illumination=N/R, Manufacturer URL=http://www.te.com, Mechanical Life=100000Cycles, Mounting=ThroughHole, Packaging=N/A, Part No=1825910-6, Pole Throw Configuration=SPST, Product Weight=N/A, RoHS=Yes, Seal Description=N/A, Seal Location=N/A, Switch Configuration=OFF(ON), Terminal Type=PCPins, Thread Size=N/R
U1_U_DAC_SET1 U1_U_DAC_SET2: library part CMP-0004-01382-1, "12-Bit, 165 MSPS SpeedPlus(TM) DAC Scalable Current Outputs between 2 to 20 mA, -40 to 85 degC, 28-pin SOP (PW28), Green (RoHS & no Sb/Br)", Manufacturer="Texas Instruments", Power Consumption(Typ)(mW)=170, Code_JEDEC=MO-153, ComponentLink1Description="Manufacturer URL", ComponentLink1URL=http://www.ti.com/, ComponentLink2Description=Datasheet, ComponentLink2URL=http://www.ti.com/general/docs/lit/getliterature.tsp?genericPartNumber=DAC902&fileType=pdf, ComponentLink3Description="Package Specification", ComponentLink3URL=http://www.ti.com/litv/pdf/mpds364, DAC Channels=1, DatasheetVersion=SBAS094B, DNL(Max)(+/-LSB)=1.75, Eco-Plan="Green (RoHS & no Sb/Br)", INL(Max)(+/-LSB)=2.5, Interface="Parallel CMOS", Mounting Technology="Surface Mount", PackageDescription="28-Pin Plastic Small Outline, Body 9.7 x 4.4 mm, Pitch 0.65 mm", PackageReference=PW28, PackageVersion="4040064-7/G, 02/2011", PartNumber=DAC902E, Resolution(Bits)=12, Settling Time(us)=0.03, SFDR(dB)=75, SubFamily="High Speed DAC (>10MSPS)"
U2_U_DAC_SET1 U2_U_DAC_SET2: library part CMP-0384-01346-2, "Double Channel Low Power Operational Amplifier, 145 MHz BW, 180 V/us SR, Industrial, 8-pin SOIC (R-8), Reel", Amplifiers Per Package=2, Generic Part Number=AD8066, Input Bias Current=2pA, Input Offset Voltage=400uV, Manufacturer="Analog Devices", Code_JEDEC=MS-012-AA, ComponentLink1Description="Manufacturer URL", ComponentLink1URL=http://www.analog.com/en/index.html, ComponentLink2Description=Datasheet, ComponentLink2URL=http://www.analog.com/static/imported-files/data_sheets/AD8065_8066.pdf, ComponentLink3Description="Package Specification", ComponentLink3URL=http://www.analog.com/static/imported-files/packages/PKG_PDF/SOIC_Narrow%20(R)/R_8.pdf, ComponentLink4Description="Reference Circuit", ComponentLink4URL=http://www.analog.com/en/all-operational-amplifiers-op-amps/operational-amplifiers-op-amps/ad8066/products/product.html#product-recommendations, DatasheetVersion="Rev. J", Iq/Amp=7.4mA, Mounting Technology="Surface Mount", PackageDescription="8-Pin Standard Small Outline Package, Body 3.9 x 4.9 mm, Pitch 1.27 mm", PackageReference=R-8, PackageVersion=060506-A, PartNumber=AD8066ARZ-R7, RevisionNote="Reference Circuit URL fixed", Slew Rate=180V/us, Small Signal Bandwidth=145MHz, V Span Max=24V, V Span Min=5V
U3_U_DAC_SET1 U3_U_DAC_SET2 U4_U_DAC_SET1 U4_U_DAC_SET2: library part CMP-1310-00291-2, "IC OPAMP GP 2 CIRCUIT 8SOIC", Case/Package=SOIC, Dual Supply Voltage=9V, Input Bias Current=250nA, Input Offset Voltage (Vos)=7mV, Max Dual Supply Voltage=16V, Max Operating Temperature=70°C, Max Supply Voltage=32V, Min Dual Supply Voltage=1.5V, Min Operating Temperature=0°C, Min Supply Voltage=3V, Nominal Supply Current=1.2mA, Operating Supply Current=1.5mA, Output Current=40mA, Package Quantity=2500, Power Supply Rejection Ratio (PSRR)=65dB, Voltage Gain=100dB, Bandwidth=1MHz, Common Mode Rejection Ratio=65dB, Contact Plating=Tin, Gain Bandwidth Product=1MHz, Halogen Free="Halogen Free", Height=1.5mm, Lead Free="Lead Free", Length=5mm, Number of Amplifiers=2, Number of Channels=2, Number of Circuits=2, Number of Elements=2, Number of Pins=8, Operating Supply Voltage=16V, Output Current per Channel=40mA, Packaging="Tape and Reel", Radiation Hardening=No, REACH SVHC="No SVHC", Slew Rate=0.6V/µs, Width=4mm
Y1: library part CMP-27762-011708-1, "Crystal 48MHz ±20ppm 18pF SMD-4 3.2mm x 2.5mm / ABM8-48.000MHZ-B2-T", Case/Package=CSMD, ESR (Equivalent Series Resistance)=35R, Frequency Stability=50ppm, Frequency Tolerance=20ppm, Load Capacitance=18pF, Max Operating Temperature=70°C, Min Operating Temperature=-20°C, Operating Frequency="48 MHz", Package Quantity=1000, Resistor Type=Ceramic, Depth=2.5mm, Frequency=48MHz, Height=0.031inch, Lead Free="Lead Free", Length=3.2mm, Mount="Surface Mount", Number of Pins=4, Packaging="Tape and Reel", Radiation Hardening=No, REACH SVHC="No SVHC", RoHS Compliant=Yes, Series=ABM8, Series Resistance=35R, Termination=SMD/SMT, Tolerance=20ppm, Width=0.098inch

## Via types
v1: diameter 0.55, hole 0.4, Top Layer to Bottom Layer, tented both sides, 224 vias

## Nets (pads, with @x,y where several pads share a name; then routed paths per layer and width w, separated by ;. In a path a pad name is that pad's centre, name@x,y a point inside that pad or via, vN(x,y) a via of type N, cw(c..) or ccw(c..) an arc to the next point about the centre after c; other vN are vias at no path point)
1DAC_CLK: IC1.81 U1_U_DAC_SET2.28 | length 24.5
  Top Layer w0.254: v1(91.117,98.408) 91.124,98.415 91.124,100.188 IC1.81@91.13,100.194 ; U1_U_DAC_SET2.28@109.988,98.459 110.532,98.459 110.532,98.478 111.093,99.039 111.093,99.274 v1(111.149,99.331)
  Bottom Layer w0.254: v1(91.117,98.408) 93.029,98.408 93.042,98.395 93.569,98.395 95.25,100.076 110.404,100.076 v1(111.149,99.331)
1DAC_OFFSET: IC1.28 U3_U_DAC_SET2.5 | length 53.9
  Top Layer w0.254: IC1.28@82.63,84.718 82.63,86.274 85.344,88.988 v1(85.344,90.424)
  Top Layer w0.508: U3_U_DAC_SET2.5@119.253,77.754 119.26,77.761 119.26,79.116 119.38,79.237 v1(119.38,79.248)
  Bottom Layer w0.254: v1(85.344,90.424) 85.344,91.531 90.886,97.074 102.788,97.074 119.323,80.539 119.323,79.305 v1(119.38,79.248)
2DAC_CLK: IC1.15 U1_U_DAC_SET1.28 | length 31.3
  Top Layer w0.254: IC1.15@79.892,91.456 85.328,91.456 87.376,89.408 v1(87.376,86.36) ; U1_U_DAC_SET1.28@100.237,73.908 100.237,74.357 100.281,74.401 100.855,74.401 v1(100.912,74.458)
  Bottom Layer w0.254: v1(87.376,86.36) 87.376,85.902 98.82,74.458 v1(100.912,74.458)
2DAC_OFFSET: IC1.29 U3_U_DAC_SET1.5 | length 31.7
  Top Layer w0.254: v1(74.168,81.28) 74.248,81.28 74.412,81.116 82.141,81.116 82.589,81.564 82.589,83.093 83.11,83.614 83.11,84.698 IC1.29@83.13,84.718 ; v1(77.949,64.799) 78.029,64.799 78.185,64.643 U3_U_DAC_SET1.5@79.532,64.643
  Bottom Layer w0.254: v1(74.168,81.28) 74.168,68.58 v1(77.949,64.799)
+3V3: C1.2 C2.2 C3.2 C4.2 C5.2 C6.2 C7.2 C8.2 C9.2 HB4.1 IC1.6 IC1.11 IC1.20 IC1.21 IC1.27 IC1.50 IC1.75 IC1.100 J0.2 J5.3 R1.2 R2.1 R3.1 R18_U_DAC_SET1.1 R18_U_DAC_SET2.1 R25.2 R26.2 R28.2 R29.2 R30.2 R31.2 R35.2 R36.2 R37.2 | length 397
  Top Layer w0.254: R1.2@77.447,89.081 R1.2@77.572,88.956 ; 79.756,88.646 79.756,88.933 IC1.20@79.779,88.956 ; IC1.21@79.892,88.456 78.804,88.456 78.14,87.792 78.14,87.411 C3.2@77.597,86.868 77.597,88.931 R1.2@77.572,88.956 ; IC1.20@79.892,88.956 IC1.20@79.779,88.956 ; IC1.11@79.892,93.456 78.756,93.456 77.995,94.217 77.995,95.106 C5.2@77.597,95.504 78.049,95.956 IC1.6@79.892,95.956 ; C7.2@80.668,102.489 81.63,101.527 IC1.100@81.63,100.194 ; C9.2@81.407,82.42 81.976,82.989 82.127,82.989 82.13,82.992 IC1.27@82.13,84.718 ; IC1.50@93.63,84.718 93.63,84.13 93.653,84.107 93.869,84.107 94.45,83.527 94.45,82.715 C6.2@94.869,82.296 ; IC1.75@95.368,98.456 96.371,98.456 96.52,98.605 96.52,99.695 97.12,100.295 97.12,100.549 C8.2@97.663,101.092 ; R1.2@77.572,88.956 IC1.20@79.779,88.956
  Top Layer w0.508: R31.2@64.958,74.676 64.958,74.93 65.204,75.176 66.54,75.176 v1(66.548,75.184)
  Top Layer w0.635: R35.2@46.67,74.676 48.26,74.676 v1(48.768,75.184) ; R30.2@46.67,88.9 v1(48.768,88.9) ; v1(55.372,62.992) 55.814,62.55 R36.2@55.814,60.452 ; R37.2@55.814,74.676 56.896,74.676 v1(57.404,75.184) ; R29.2@55.814,88.9 v1(56.896,88.9) ; v1(71.12,70.104) 72.136,69.088 R18_U_DAC_SET1.1@72.136,68.006 ; v1(82.116,104.925) 82.116,105.002 83.444,106.33 R3.1@83.444,106.68 ; R2.1@89.85,106.68 89.85,109.714 88.392,111.172 HB4.1@88.392,112.268 89.573,112.268 90.436,113.131 104.421,113.131 J0.2@107.742,109.81 ; v1(93.472,80.772) 93.551,80.851 93.551,81.146 94.169,81.763 94.486,81.763 94.869,82.146 C6.2@94.869,82.296 ; C8.2@97.663,101.092 97.663,101.242 98.046,101.625 98.196,101.625 v1(98.806,102.235) ; R18_U_DAC_SET2.1@113.284,70.358 113.284,70.257 113.101,70.074 112.214,70.074 111.76,69.621 111.76,67.583 113.303,66.04 116.332,66.04 ; R25.2@117.414,69.088 117.414,67.122 116.332,66.04 ; R26.2@118.938,48.26 v1(119.809,48.26) ; v1(119.38,62.992) 116.332,66.04 ; R28.2@127.95,48.26 128.133,48.443 128.133,48.885 v1(128.926,49.678)
  Top Layer w0.762: v1(76.195,101.092) 77.444,101.092 C1.2@77.47,101.066 79.095,101.066 80.049,102.02 80.049,102.17 80.368,102.489 C7.2@80.518,102.489 82.116,104.087 v1(82.116,104.925) ; v1(76.454,96.647) 77.597,96.647 ; C2.2@76.835,84.328 v1(78.232,84.328) ; C5.2@77.597,95.504 77.597,96.647 ; C4.2@77.597,98.044 77.597,96.647 ; C9.2@81.407,82.296 81.407,82.42 81.407,82.446 79.525,84.328 v1(78.232,84.328) ; C2.2@77.216,84.859 77.216,85.637 77.278,85.699 77.278,86.549 C3.2@77.597,86.868 ; C2.2@77.216,84.859 77.597,85.24 C3.2@77.597,86.868 ; C2.2@77.216,84.859 77.701,84.859 v1(78.232,84.328) ; C3.2@77.597,86.868 77.916,86.549 77.916,85.593 78.232,85.277 v1(78.232,84.328)
  Layer 3 w0.508: 65.024,75.692 65.521,75.692
  Layer 3 w0.635: v1(48.768,75.184) 49.276,75.692 52.052,75.692 ; v1(48.768,88.9) 49.276,89.408 51.308,89.408 56.388,89.408 v1(56.896,88.9) ; v1(55.372,62.992) 55.372,75.692 ; 65.521,75.692 66.029,75.184 v1(66.548,75.184) 67.056,75.184 71.12,71.12 v1(71.12,70.104) 71.12,61.976 83.31,49.786 108.286,49.786 109.812,48.26 v1(119.809,48.26) 127.508,48.26 v1(128.926,49.678) 129.54,50.292 129.54,52.832 v1(119.38,62.992) ; 76.454,92.456 81.969,92.456 85.525,88.9 87.376,88.9 90.439,85.837 90.439,84.313 93.472,81.28 v1(93.472,80.772) ; HB4.1@88.392,112.268 89.283,112.268 91.823,109.728 96.52,109.728 99.532,106.716 99.532,102.961 v1(98.806,102.235)
  Layer 3 w1.27: J5.3@45.212,107.696 45.313,107.595 46.329,107.595 51.308,102.616 ; 65.024,75.692 57.912,75.692 v1(57.404,75.184) 57.213,75.184 56.706,75.692 55.372,75.692 52.052,75.692 51.308,76.436 51.308,89.408 51.308,102.616 ; v1(76.195,101.092) 75.184,101.092 73.66,102.616 51.308,102.616 ; 76.218,84.953 76.843,84.328 77.532,84.328 ; 76.826,85.033 77.532,84.328 ; v1@78.232,85.344 v1(78.232,84.328) 77.532,84.328
  Layer 3 w2.54: 76.826,85.033 76.454,85.406 76.454,92.456 v1(76.454,96.647) 76.454,100.833 v1(76.195,101.092) 78.378,103.275 79.399,103.275 HB4.1@88.392,112.268
  other v1: 78.215,85.329
+5: C15_U_DAC_SET1.2 C15_U_DAC_SET2.2 C17_U_DAC_SET1.2 C17_U_DAC_SET2.2 HB3.1 U1_U_DAC_SET1.24 U1_U_DAC_SET1.27 U1_U_DAC_SET2.24 U1_U_DAC_SET2.27 | length 77.8
  Top Layer w0.305: U1_U_DAC_SET1.24@97.637,73.908 97.637,73.371 97.756,73.251 97.756,73.163 98.067,72.852 99.157,72.852 99.468,73.163 99.468,73.251 U1_U_DAC_SET1.27@99.587,73.371 ; U1_U_DAC_SET1.27@99.587,73.56 U1_U_DAC_SET1.27@99.587,73.371 ; U1_U_DAC_SET1.27@99.587,73.679 U1_U_DAC_SET1.27@99.587,73.908 ; C15_U_DAC_SET1.2@99.949,70.866 99.587,71.228 U1_U_DAC_SET1.27@99.587,73.371 ; U1_U_DAC_SET2.24@109.988,95.859 111.164,95.859 112.346,97.041 112.346,97.625 C15_U_DAC_SET2.2@112.53,97.809 ; U1_U_DAC_SET2.27@109.988,97.809 C15_U_DAC_SET2.2@112.53,97.809 ; C15_U_DAC_SET2.2@113.03,98.171 112.892,98.171 C15_U_DAC_SET2.2@112.53,97.809
  Top Layer w0.635: v1(98.044,70.104) 98.296,70.356 99.566,70.356 99.949,70.739 C15_U_DAC_SET1.2@99.949,70.866
  Top Layer w0.762: C17_U_DAC_SET1.2@91.948,68.704 92.498,68.704 92.917,69.123 92.917,70.057 v1(92.964,70.104) ; C15_U_DAC_SET2.2@113.03,98.171 113.157,98.044 v1(114.3,98.044) ; v1(113.792,91.77) 114.327,91.77 114.773,91.324 114.773,90.589 C17_U_DAC_SET2.2@115.192,90.17 ; v1(123.211,91.44) 124.429,91.44 128.016,87.853 HB3.1@128.016,86.868
  Layer 3 w0.762: v1(92.964,70.104) v1(98.044,70.104) 110.744,82.804 110.744,85.852 113.792,88.9 v1(113.792,91.77) ; v1(114.3,98.044) 113.792,97.536 v1(113.792,91.77) ; v1(123.211,91.44) 116.667,91.44 116.337,91.77 v1(113.792,91.77)
+12: HB5.1 U2_U_DAC_SET1.8 U2_U_DAC_SET2.8 U3_U_DAC_SET1.8 U3_U_DAC_SET2.8 U4_U_DAC_SET1.8 U4_U_DAC_SET2.8 | length 95.1
  Top Layer w0.508: U4_U_DAC_SET1.8@78.964,70.231 78.964,69.35 ; U3_U_DAC_SET1.8@79.532,68.453 78.98,68.453 78.964,68.469 78.964,69.35 ; v1(81.079,68.812) 80.54,69.35 78.964,69.35 ; U2_U_DAC_SET1.8@92.038,62.611 92.075,62.648 93.116,62.648 93.453,62.984 v1@93.464,62.984 ; U2_U_DAC_SET2.8@121.285,90.26 121.285,89.36 122.253,88.392 122.936,88.392 124.46,86.868 124.46,77.724 126.041,76.143 126.041,75.749 HB5.1@125.984,75.692 ; HB5.1@128.016,75.184 127.508,75.692 HB5.1@125.984,75.692 ; U4_U_DAC_SET2.8@113.665,77.536 U4_U_DAC_SET2.8@113.665,77.186 U4_U_DAC_SET2.8@113.665,77.536 ; U4_U_DAC_SET2.8@113.665,77.536 113.681,77.552 115.427,77.552 115.443,77.568 U3_U_DAC_SET2.8@115.443,77.754 115.443,76.581 116.332,75.692 HB5.1@125.984,75.692
  Layer 3 w0.508: v1(81.079,68.812) 84.358,65.532 93.472,65.532 93.688,65.532 ; v1(93.472,62.992) 93.472,65.316 93.688,65.532 ; HB5.1@128.016,75.184 127.508,75.184 124.968,72.644 107.188,72.644 100.076,65.532 93.688,65.532
-12: HB2.1 U2_U_DAC_SET1.4 U2_U_DAC_SET2.4 U3_U_DAC_SET1.4 U3_U_DAC_SET2.4 U4_U_DAC_SET1.4 U4_U_DAC_SET2.4 | length 125
  Top Layer w0.508: v1(73.152,64.516) 73.163,64.516 73.29,64.643 U3_U_DAC_SET1.4@74.9,64.643 ; U4_U_DAC_SET1.4@83.596,74.041 83.603,74.048 85.212,74.048 85.333,74.168 v1(85.344,74.168) ; v1(95.288,66.548) 95.299,66.548 95.39,66.458 96.901,66.458 U2_U_DAC_SET1.4@96.938,66.421 ; v1(108.339,79.113) 108.339,79.115 109.848,80.624 109.848,81.811 U4_U_DAC_SET2.4@109.855,81.818 ; U2_U_DAC_SET2.4@117.473,94.087 117.473,93.855 118.364,92.964 121.92,92.964 124.46,95.504 124.46,98.552 128.016,102.108 HB2.1@128.016,103.124 ; v1(118.872,74.676) 118.88,74.668 118.88,74.17 119.253,73.797 U3_U_DAC_SET2.4@119.253,73.122
  Layer 3 w0.508: v1(73.152,64.516) 74.9,64.516 ; 108.204,78.232 108.204,78.584 108.331,78.711 108.331,79.105 v1(108.339,79.113)
  Layer 3 w1.016: 74.9,64.516 76.2,64.516 77.216,65.532 77.216,72.644 78.74,74.168 v1(85.344,74.168) 86.868,74.168 94.488,66.548 v1(95.288,66.548) 96.52,66.548 108.204,78.232 110.236,78.232 114.3,74.168 118.364,74.168 v1(118.872,74.676) 120.417,76.221 120.417,85.873 124.46,89.916 124.46,98.552 128.016,102.108 HB2.1@128.016,103.124
\D\A\C\_\I\O\U\T\_U_DAC_SET1: R10_U_DAC_SET1.2 R15_U_DAC_SET1.1 U1_U_DAC_SET1.21 | length 28.3
  Top Layer w0.305: U1_U_DAC_SET1.21@95.687,73.908 95.687,74.859 97.028,76.2 102.616,76.2 106.68,72.136 106.68,62.484 106.078,61.882 105.504,61.882 R15_U_DAC_SET1.1@105.156,61.534
  Top Layer w0.508: R10_U_DAC_SET1.2@102.616,61.534 R15_U_DAC_SET1.1@105.156,61.534
\D\A\C\_\I\O\U\T\_U_DAC_SET2: R10_U_DAC_SET2.2 R15_U_DAC_SET2.1 U1_U_DAC_SET2.21 | length 25.7
  Top Layer w0.305: U1_U_DAC_SET2.21@109.988,93.909 109.979,93.918 109.282,93.918 108.712,94.488 108.712,94.491 108.424,94.779 108.424,98.889 114.294,104.759 121.23,104.759 121.914,104.076 122.014,104.076 122.362,103.728 R15_U_DAC_SET2.1@122.362,103.378
  Top Layer w0.508: R10_U_DAC_SET2.2@122.362,100.838 R15_U_DAC_SET2.1@122.362,103.378
AC-Diff_OP-AMP_U_DAC_SET1: R8_U_DAC_SET1.2 R11_U_DAC_SET1.2 U2_U_DAC_SET1.1 | length 16.9
  Top Layer w0.508: R11_U_DAC_SET1.2@86.36,62.55 86.36,60.96 v1(86.868,60.452) ; v1(90.932,60.452) 93.879,60.452 96.038,62.611 97.89,62.611 97.986,62.515 98.013,62.515 98.866,61.662 99.948,61.662 R8_U_DAC_SET1.2@100.076,61.534
  Bottom Layer w0.508: v1(86.868,60.452) v1(90.932,60.452)
AC-Diff_OP-AMP_U_DAC_SET2: R8_U_DAC_SET2.2 R11_U_DAC_SET2.2 U2_U_DAC_SET2.1 | length 16.6
  Top Layer w0.508: U2_U_DAC_SET2.1@121.285,95.16 121.322,95.197 121.322,96.319 121.679,96.676 122.362,96.676 ; R11_U_DAC_SET2.2@121.346,84.582 121.346,84.932 122.278,85.864 122.297,85.864 v1(122.305,85.872) ; R8_U_DAC_SET2.2@122.362,98.298 122.362,96.676 ; v1(122.428,96.012) 122.428,96.023 122.362,96.089 122.362,96.319 122.362,96.676
  Bottom Layer w0.508: v1@122.305,85.883 122.326,85.904 122.326,85.923 122.355,85.952 122.355,95.928 122.428,96.001 v1(122.428,96.012)
"Buffered STM_DAC_U_DAC_SET1": R22_U_DAC_SET1.2 U3_U_DAC_SET1.6 U3_U_DAC_SET1.7 | length 3.6
  Top Layer w0.508: U3_U_DAC_SET1.6@79.532,65.913 U3_U_DAC_SET1.7@79.532,67.183 80.207,67.183 80.334,67.056 R22_U_DAC_SET1.2@81.854,67.056